# Altium PCB MABSS_voltageSensor.PcbDoc
Units mm, origin at the board's own origin, x right, y up, seen from the top; angles counter-clockwise.
Board outline 25.4 x 30.99 mm, 2 copper layers (Top Layer, Bottom Layer); 22 components, 20 nets, 77 pads, 11 vias.
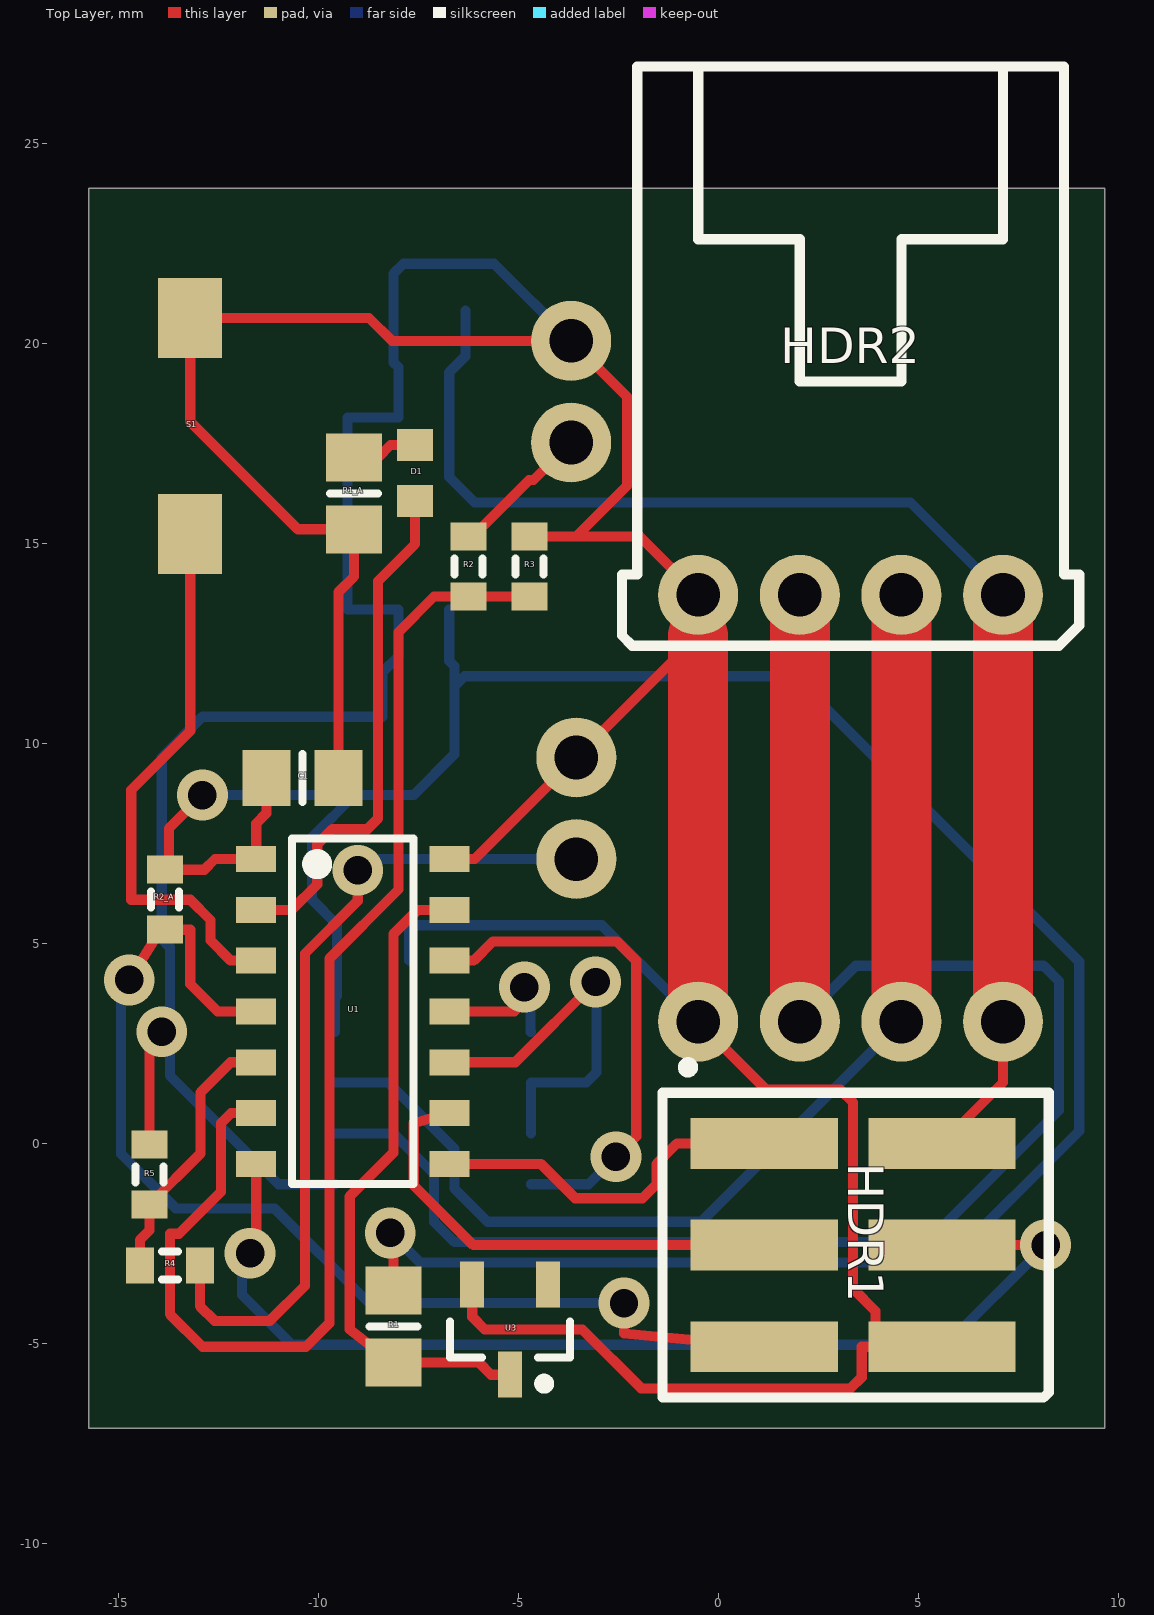
[diagram p0: Top Layer view]
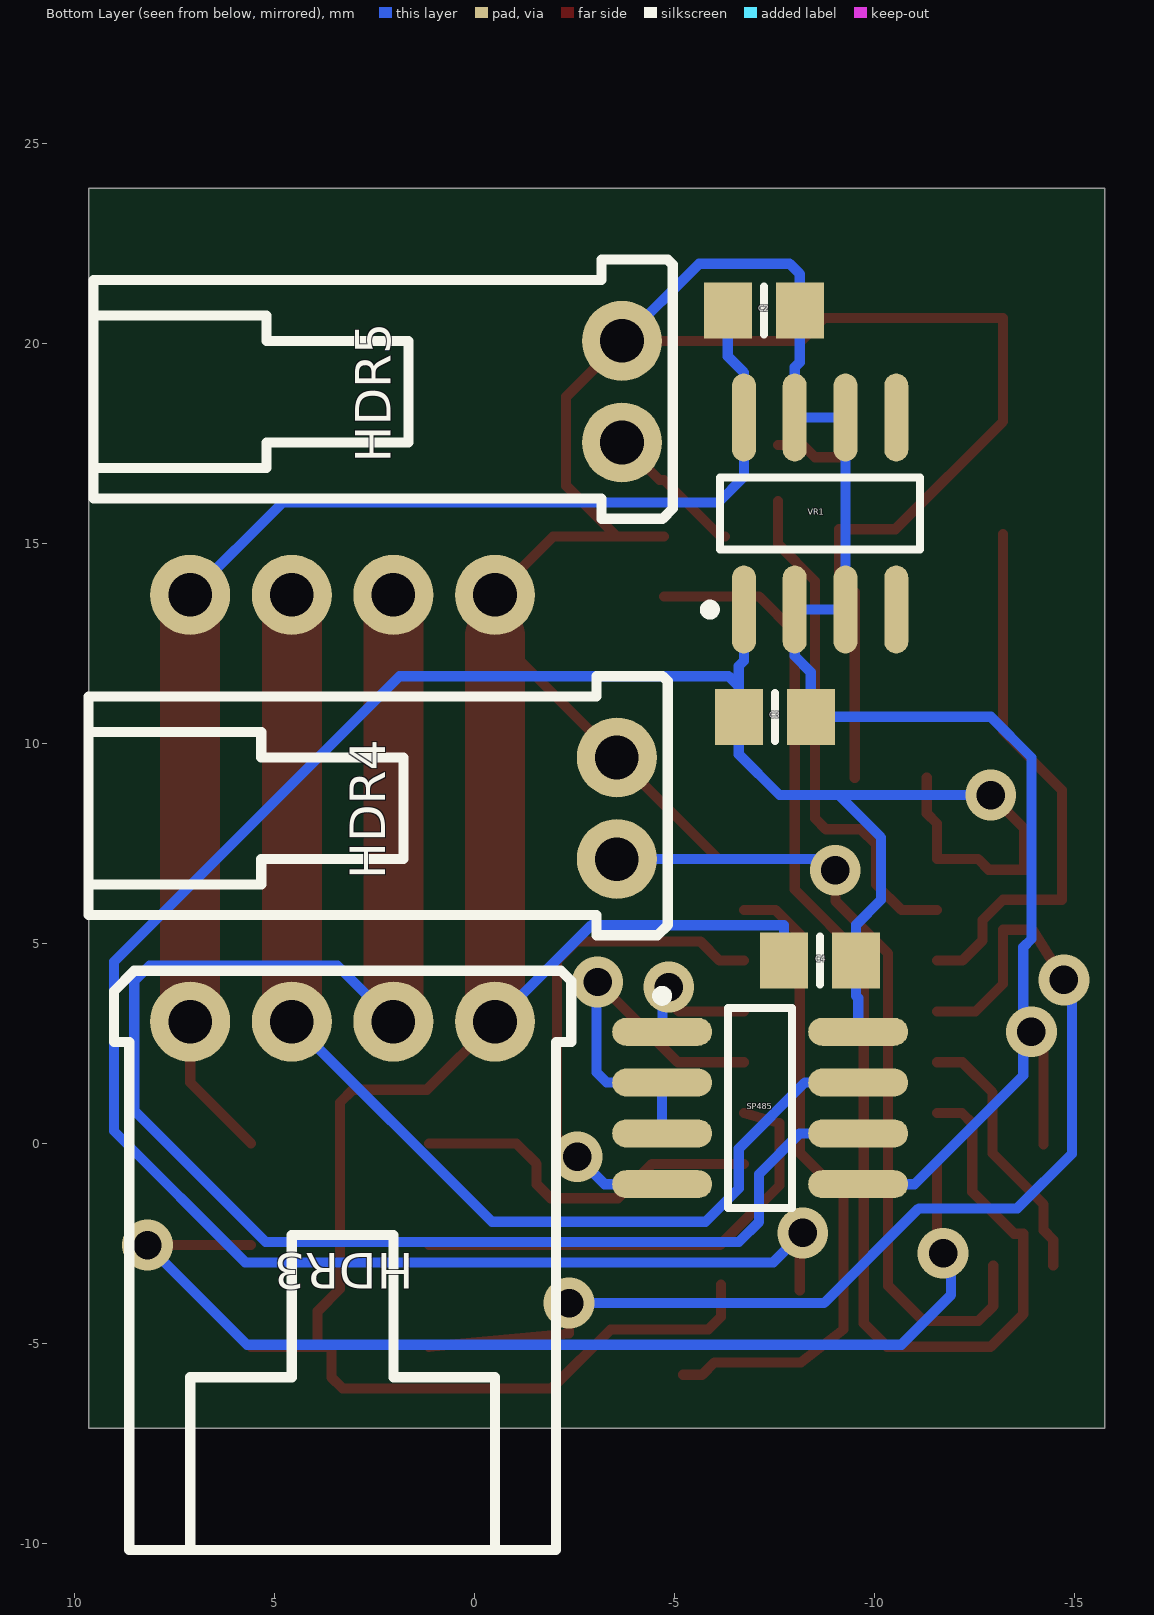
[diagram p1: Bottom Layer view, seen from below]

## Layer stack, top to bottom
Top Solder: solder mask 0.0102, Solder Resist, Dk 3.5
Top Layer: signal copper 0.0356
Dielectric 1: dielectric 0.32, FR-4, Dk 4.8
Bottom Layer: signal copper 0.0356
Bottom Solder: solder mask 0.0102, Solder Resist, Dk 3.5

## Board outline
-15.748,-7.112 9.652,-7.112 9.652,23.876 -15.748,23.876

## Design rules (kind name [scope] priority, off if disabled: settings)
Clearance [All] p1: gap=0.254
PolygonConnect [All] p1: connectstyle=Relief reliefconductorwidth=0.254 reliefentries=4 polygonreliefangle="90 Angle" airgapwidth=0.254
RoutingVias [All] p1: holewidth=0.711 width=1.27 viastyle="Through Hole" minholewidth=0.711 minwidth=1.27 maxholewidth=0.711 maxwidth=1.27
SolderMaskExpansion [All] p1: expansion=0.102
Width [All] p1: maxlimit=2 minlimit=0.254 preferedwidth=0.254
30 further rules are at their usual default settings.

## Classes and differential pairs
component class U_general_Interface: C1 C2 C3 C4 D1 R1_A R2_A S1 SP485 U1 VR1
component class U_sensor_specific: HDR1 HDR2 HDR3 HDR4 HDR5 R1 R2 R3 R4 R5 U3

## Components (designator, comment, footprint, x,y, rotation, side; value= is the part's Value field where it differs from the comment)
C1 "Cap2" 6-0805_N -10.403,9.144 r0 top
C2 "Cap2" 6-0805_N -7.228,20.828 r180 bottom
C3 "Cap2" 6-0805_N -7.504,10.668 r180 bottom
C4 "Cap2" 6-0805_N -8.636,4.572 r0 bottom
D1 "LED0" 1608[0603] -7.587,16.764 r90 top
HDR1 "Programming header" MOLEX_HEADER_6_SMD 1.143,0 r270 top
HDR2 "RS-485 interface" MOLEX_HEADER_4H_SHRD -0.508,13.716 r0 top
HDR3 "RS-485 interface" MOLEX_HEADER_4H_SHRD -0.508,3.048 r0 bottom
HDR4 "MOLEX_HEADER_2H_SHRD" MOLEX_HEADER_2H_SHRD -3.429,8.382 r90 bottom
HDR5 "MOLEX_HEADER_2H_SHRD" MOLEX_HEADER_2H_SHRD -3.556,18.796 r90 bottom
R1 "Res1" 6-0805_N -8.128,-4.572 r90 top
R1_A "Res1" 6-0805_N -9.111,16.256 r270 top
R2 "Res1" J1-0603 -6.254,14.424 r270 top
R2_A "Res1" J1-0603 -13.843,6.096 r90 top
R3 "Res1" J1-0603 -4.73,14.424 r90 top
R4 "Res1" J1-0603 -13.716,-3.048 r180 top
R5 "Res1" J1-0603 -14.224,-0.774 r90 top
S1 "SW-PB" ADTSM3 -12.308,14.14 r90 top
SP485 "SP485" 8S1_M -7.138,0.889 r180 bottom
U1 "ATtiny441" 6ST1_L -9.144,3.302 r0 top
U3 "Vref" SOT23_N -5.207,-4.654 r270 top
VR1 "L78L05ACD" 8S1_N -8.636,15.748 r90 bottom

## Footprints (in the part's own frame and the unit in brackets; to place one, negate y for a bottom-side part, rotate by r counter-clockwise, add the part's x,y. Pads: shape width x height; smd on the part's side, far side on the other; paste and mask are expansions set on the pad)
6-0805_N [mm] "Chip Resistor, Body 2.0x1.2mm, IPC Medium Density"
  rect 1.2x1.4 smd: 1(-0.9,0) 2(0.9,0)
  silkscreen extent 0,-0.6 0,0.6, body extent -1.07,-0.7 1.07,0.7, height 0.7
6ST1_L [mm] "SOT23, 6-Leads, Body 2.9x1.6mm, Pitch 0.95mm, Lead Span 2.7mm, IPC High Density"
  rect 1x0.65 smd: 1(-2.413,3.81) 2(-2.413,2.54) 3(-2.413,1.27) 4(-2.413,0) 5(-2.413,-1.27) 6(-2.413,-2.54) 7(-2.413,-3.81) 8(2.413,-3.81) 9(2.413,-2.54) 10(2.413,-1.27) 11(2.413,0) 12(2.413,1.27) 13(2.413,2.54) 14(2.413,3.81)
  silkscreen extent -1.52,-4.32 1.52,4.32, body extent -1.91,-4.32 1.91,4.32, height 1.45
8S1_M [mm] "SOIC, 8-Leads, Body 4.9x3.9mm, Pitch 1.27mm, IPC Low Density"
  oval 2.5x0.7 smd: 1(-2.45,1.905) 2(-2.45,0.635) 3(-2.45,-0.635) 4(-2.45,-1.905) 5(2.45,-1.905) 6(2.45,-0.635) 7(2.45,0.635) 8(2.45,1.905)
  silkscreen extent -2.58,-2.5 0.8,2.93, body extent -2,-2.5 2,2.5, height 1.75
8S1_N [mm] "SOIC, 8-Leads, Body 4.9x3.9mm, Pitch 1.27mm, IPC Medium Density"
  oval 2.2x0.6 smd: 1(-2.4,1.905) 2(-2.4,0.635) 3(-2.4,-0.635) 4(-2.4,-1.905) 5(2.4,-1.905) 6(2.4,-0.635) 7(2.4,0.635) 8(2.4,1.905)
  silkscreen extent -2.52,-2.5 0.9,2.88, body extent -2,-2.5 2,2.5, height 1.75
1608[0603] [mm] "Chip Capacitor, Body 1.6x0.8mm, IPC High Density"
  rect 0.8x0.9 smd: 1(-0.7,0) 2(0.7,0)
  body extent -0.87,-0.48 0.87,0.48, height 1.3
ADTSM3 [mm]
  rect 2x1.6 smd: 1(1.1,0.9) 2(6.5,0.9)
  body extent 1,-1.3 6.6,3.1, height 4
J1-0603 [mm] "Chip Resistor, Body 1.6x0.8mm, IPC High Density"
  rect 0.7x0.9 smd: 1(-0.75,0) 2(0.75,0)
  silkscreen extent -0.2,-0.35 0.2,0.35, body extent -0.85,-0.48 0.85,0.48, height 0.9
MOLEX_HEADER_2H_SHRD [mm]
  round 2 hole 1.09: 1(-1.27,-0.127) 2(1.27,-0.127)
  silkscreen extent -3.18,-1.4 3.3,13.08, body extent -3.68,-0.83 3.68,12.76, height 7.06
MOLEX_HEADER_4H_SHRD [mm]
  round 2 hole 1.09: 1(0,0) 2(2.54,0) 3(5.08,0) 4(7.62,0)
  silkscreen extent -1.91,-1.27 9.53,13.21, body extent -2.54,-0.7 10.16,12.89, height 7.06
MOLEX_HEADER_6_SMD [mm] "Part Number: 15-91-0060"
  rect 1.27x3.68 smd: 1(0,0) 2(0,4.445) 3(2.54,0) 4(2.54,4.445) 5(5.08,0) 6(5.08,4.445)
  silkscreen extent -2.03,-2.54 6.35,7.11, body extent -1.14,-1.33 6.48,5.65, height 9.64
SOT23_N [mm] "SOT23, 3-Leads, Body 2.9x1.3mm, Pitch 0.95mm, Lead Span 2.3mm - Reverse Pinning, IPC Medium Density"
  rect 1.15x0.6 smd: 1(1.125,0) 2(-1.125,-0.95) 3(-1.125,0.95)
  silkscreen extent -0.2,-1.5 1.47,1.5, body extent -0.7,-1.5 0.7,1.5, height 1.1

## Part data
C1 C2 C3 C4: "Capacitor"
D1: "Typical INFRARED GaAs LED"
HDR1: library part PRGM_HDR
HDR2 HDR3: library part MABSS_RS485, "Part Number: 70553-0003. MABSS connector"
HDR4 HDR5: "Part Number: 70553-0001. 2-wire signal inputs"
R1 R1_A R2 R2_A R3 R4 R5: "Resistor"
S1: "Switch"
VR1: "Positive Voltage Regulator"

## Via types
v1: diameter 1.27, hole 0.711, Top Layer to Bottom Layer, 11 vias

## Nets (pads, with @x,y where several pads share a name; then routed paths per layer and width w, separated by ;. In a path a pad name is that pad's centre, name@x,y a point inside that pad or via, vN(x,y) a via of type N, cw(c..) or ccw(c..) an arc to the next point about the centre after c; other vN are vias at no path point)
+5V: C1.1 C3.1 C4.1 R1.2 R2_A.2 SP485.8 U1.1 VR1.1 | length 67
  Top Layer w0.254: R2_A.2 R2_A.2@-13.741,6.846 ; v1(-12.903,8.712) -13.741,7.874 R2_A.2@-13.741,6.846 ; C1.1 -11.303,8.255 -11.557,8.001 U1.1 -12.586,7.112 -12.852,6.846 R2_A.2@-13.741,6.846 ; v1(-8.204,-2.235) -8.128,-2.311 R1.2
  Bottom Layer w0.254: v1(-12.903,8.712) -9.102,8.712 ; SP485.8 -9.588,3.632 -9.536,3.684 C4.1 -9.536,5.472 -10.16,6.096 -10.16,7.654 -9.102,8.712 ; v1(-8.204,-2.235) -7.468,-2.972 5.734,-2.972 9.017,0.311 9.017,4.547 1.88,11.684 -6.35,11.684 -6.604,11.43 ; VR1.1 -6.731,12.065 -6.604,11.938 -6.604,11.43 ; -9.102,8.712 -7.62,8.712 -6.604,9.728 C3.1 -6.604,11.43
GND: C1.2 C2.2 C3.2 C4.2 HDR1.6 HDR2.1 HDR3.1 HDR4.2 HDR5.2 R1_A.2 R3.2 R5.2 S1.2 SP485.5 U1.14 U3.2 VR1.2 VR1.3 VR1.6 VR1.7 | length 130
  Top Layer w0.254: R5.2 -14.224,2.489 v1(-13.919,2.794) ; C1.2 -9.503,13.781 -9.111,14.173 R1_A.2 -10.516,15.356 -13.208,18.048 S1.2 -8.738,20.64 -8.164,20.066 HDR5.2 -2.286,18.669 -2.286,16.444 -3.556,15.174 ; U1.14 -6.096,7.112 HDR4.2 -0.508,12.7 HDR2.1 -1.966,15.174 -3.556,15.174 ; U3.2 -6.157,-4.333 -5.842,-4.648 -3.404,-4.648 -1.93,-6.121 3.302,-6.121 3.581,-5.842 3.581,-5.08 HDR1.6@3.926,-5.08 ; R3.2 -3.556,15.174 ; HDR3.1 1.194,1.346 3.048,1.346 3.367,1.027 3.367,-3.632 3.926,-4.191 HDR1.6@3.926,-5.08 ; HDR1.6 HDR1.6@3.926,-5.08
  Top Layer w1.5: HDR3.1 -0.508,12.7
  Bottom Layer w0.254: v1(-13.919,2.794) -13.919,2.879 v1@-13.716,3.082 ; SP485.5 -10.998,-1.016 -13.716,1.702 v1@-13.716,3.082 ; C4.2 -7.736,5.458 -2.918,5.458 HDR3.1 ; HDR5.2 -5.613,21.996 -7.874,21.996 -8.128,21.742 C2.2 -8.128,19.533 -8.001,19.406 VR1.7 VR1.6 VR1.3 VR1.2 -8.001,12.189 -8.404,11.786 C3.2 -12.903,10.668 -13.919,9.652 -13.919,5.114 -13.716,4.911 v1@-13.716,3.082
NetD1_1: D1.1 U1.2 | length 12.9
  Top Layer w0.254: U1.2 -10.668,5.842 -10.033,6.477 -10.033,7.475 -9.652,7.856 -8.781,7.856 -8.509,8.128 -8.509,14.064 -7.587,14.986 D1.1
NetD1_2: D1.2 R1_A.1 | length 1.7
  Top Layer w0.254: R1_A.1 -8.509,17.156 -8.201,17.464 D1.2
NetHDR1_1: HDR1.1 U1.8 | length 9.1
  Top Layer w0.254: U1.8 -4.441,-0.508 -3.581,-1.367 -1.901,-1.367 -1.549,-1.016 -1.549,-0.508 -1.041,0 HDR1.1
NetHDR1_3: HDR1.3 U1.9 | length 11.9
  Top Layer w0.254: U1.9 -7.62,0.508 -7.62,-1.049 -6.129,-2.54 HDR1.3
NetHDR1_4: HDR1.4 U1.7 | length 27.8
  Top Layer w0.254: v1(-11.709,-2.743) -11.557,-2.591 U1.7 ; HDR1.4 v1(8.179,-2.54)
  Bottom Layer w0.254: v1(-11.709,-2.743) -11.913,-2.743 -11.913,-3.785 -10.668,-5.029 5.69,-5.029 v1(8.179,-2.54)
NetHDR1_5: HDR1.5 R2_A.1 U1.4 | length 28.5
  Top Layer w0.254: v1(-14.732,4.089) -13.945,5.346 R2_A.1 -13.208,5.346 -13.208,3.988 -12.522,3.302 U1.4 ; v1(-2.362,-3.988) -2.362,-4.75 HDR1.5
  Bottom Layer w0.254: v1(-14.732,4.089) -14.935,4.089 -14.935,-0.254 -13.569,-1.62 -11.105,-1.62 -8.738,-3.988 v1(-2.362,-3.988)
NetHDR2_2: HDR2.2 HDR3.2 SP485.6 | length 42.4
  Top Layer w1.5: HDR3.2 HDR2.2
  Bottom Layer w0.254: SP485.6 -8.128,0.254 -7.112,-0.762 -7.112,-1.956 -6.604,-2.464 5.221,-2.464 8.509,0.824 8.509,4.064 8.128,4.445 3.429,4.445 HDR3.2
NetHDR2_3: HDR2.3 HDR3.3 SP485.7 | length 28.9
  Top Layer w1.5: HDR3.3 HDR2.3
  Bottom Layer w0.254: SP485.7 -8.255,1.524 -6.604,-0.127 -6.604,-1.125 -5.773,-1.956 -0.432,-1.956 HDR3.3
NetHDR4_1: HDR4.1 R4.1 | length 20.7
  Top Layer w0.254: R4.1 -12.966,-4.064 -12.596,-4.434 -11.216,-4.434 -10.338,-3.556 -10.338,4.75 -9.017,6.071 v1(-9.017,6.833)
  Bottom Layer w0.254: v1(-9.017,6.833) -8.738,7.112 HDR4.1
NetHDR5_1: HDR5.1 R2.1 | length 3.5
  Top Layer w0.254: R2.1 -6.147,15.174 -4.735,16.586 -4.623,16.586 HDR5.1
NetR1_1: R1.1 U1.13 U3.1 | length 16.4
  Top Layer w0.254: U1.13 -7.518,5.842 -8.128,5.232 -8.128,-0.229 -9.22,-1.321 -9.22,-4.648 -8.153,-5.472 R1.1 -5.994,-5.472 -5.687,-5.779 U3.1
NetR2_2: R2.2 R3.1 U1.6 | length 32.6
  Top Layer w0.254: U1.6 -12.184,0.762 -12.438,0.508 -12.438,-1.206 -13.487,-2.255 -13.716,-2.255 -13.716,-4.264 -12.9,-5.08 -10.312,-5.08 -9.728,-4.496 -9.728,4.623 -8.001,6.35 -8.001,12.785 -7.112,13.674 R2.2 R3.1
NetR4_2: R4.2 R5.1 U1.5 | length 6.7
  Top Layer w0.254: R4.2 -14.466,-2.413 -14.224,-2.171 R5.1 -12.946,-0.246 -12.946,1.278 -12.192,2.032 U1.5
NetS1_1: S1.1 U1.3 | length 13.8
  Top Layer w0.254: S1.1 -13.208,10.312 -14.681,8.839 -14.681,6.096 -13.208,6.096 -12.7,5.588 -12.7,5.08 -12.192,4.572 U1.3
NetSP485_1: SP485.1 U1.11 | length 3.5
  Top Layer w0.254: U1.11 -5.105,3.302 -4.851,3.556 v1(-4.851,3.912)
  Bottom Layer w0.254: v1(-4.851,3.912) -4.699,3.759 -4.699,2.794 SP485.1
NetSP485_2: SP485.2 SP485.3 U1.10 | length 9.8
  Top Layer w0.254: U1.10 -5.08,2.032 v1(-3.073,4.039)
  Bottom Layer w0.254: SP485.3 SP485.2 -3.302,1.524 -3.048,1.778 -3.048,4.013 v1(-3.073,4.039)
NetSP485_4: SP485.4 U1.12 | length 12.6
  Top Layer w0.254: U1.12 -6.121,4.572 -5.639,5.055 -2.54,5.055 -2.057,4.572 -2.057,0.178 v1(-2.565,-0.33)
  Bottom Layer w0.254: SP485.4 -3.251,-1.016 v1(-2.565,-0.33)
VCC: C2.1 HDR1.2 HDR2.4 HDR3.4 VR1.8 | length 33.7
  Top Layer w0.254: HDR1.2 7.112,1.524 HDR3.4
  Top Layer w1.5: HDR3.4 HDR2.4
  Bottom Layer w0.254: C2.1 -6.328,19.682 -6.731,19.279 VR1.8 -6.731,16.662 -6.096,16.027 4.801,16.027 HDR2.4
pads on no net: U3.3 VR1.4 VR1.5